# Altium PCB PCB1.PcbDoc
Units mil, origin at the board's own origin, x right, y up, seen from the top; angles counter-clockwise.
Board outline 2645.03 x 2125.03 mil, 2 copper layers (Top Layer, Bottom Layer); 38 components, 28 nets, 123 pads, 32 vias.
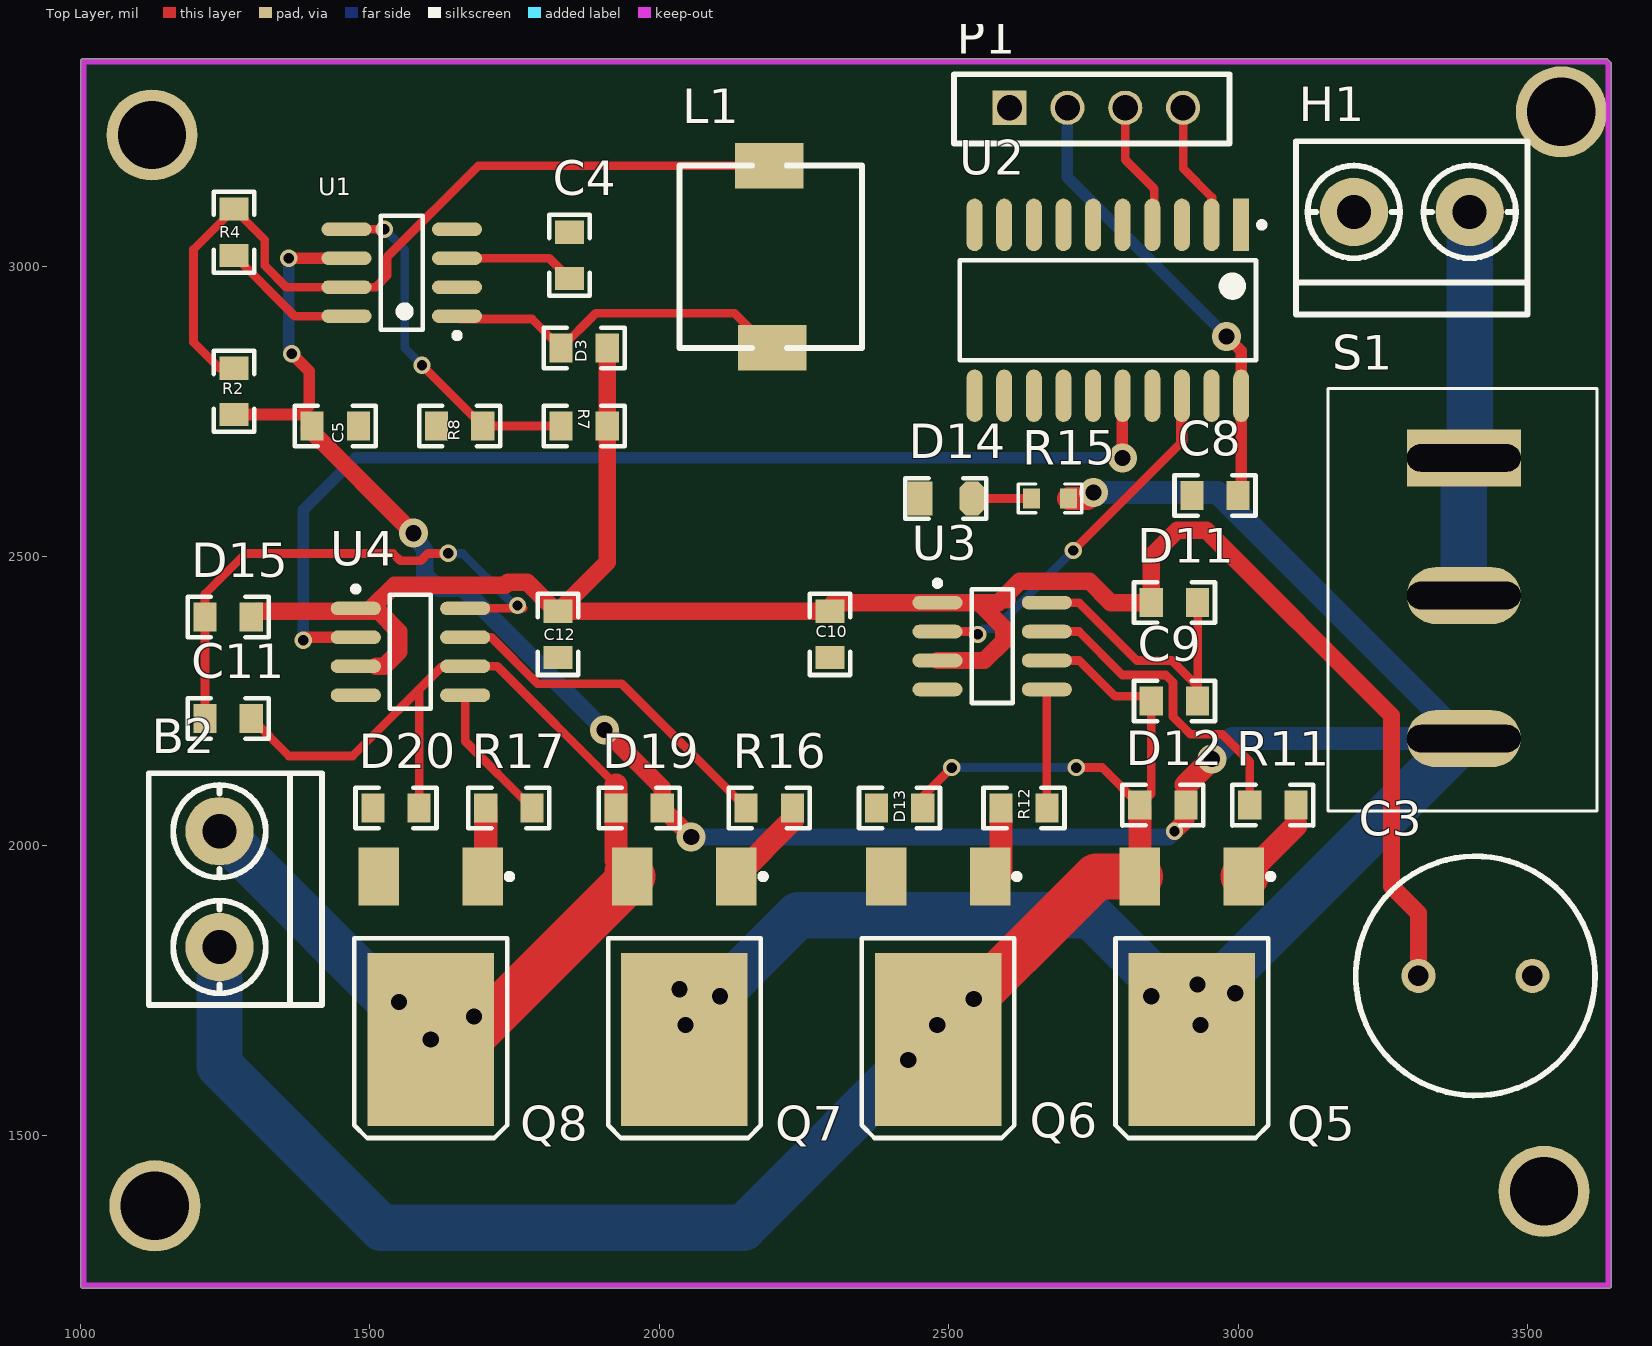
[diagram p0: Top Layer view]
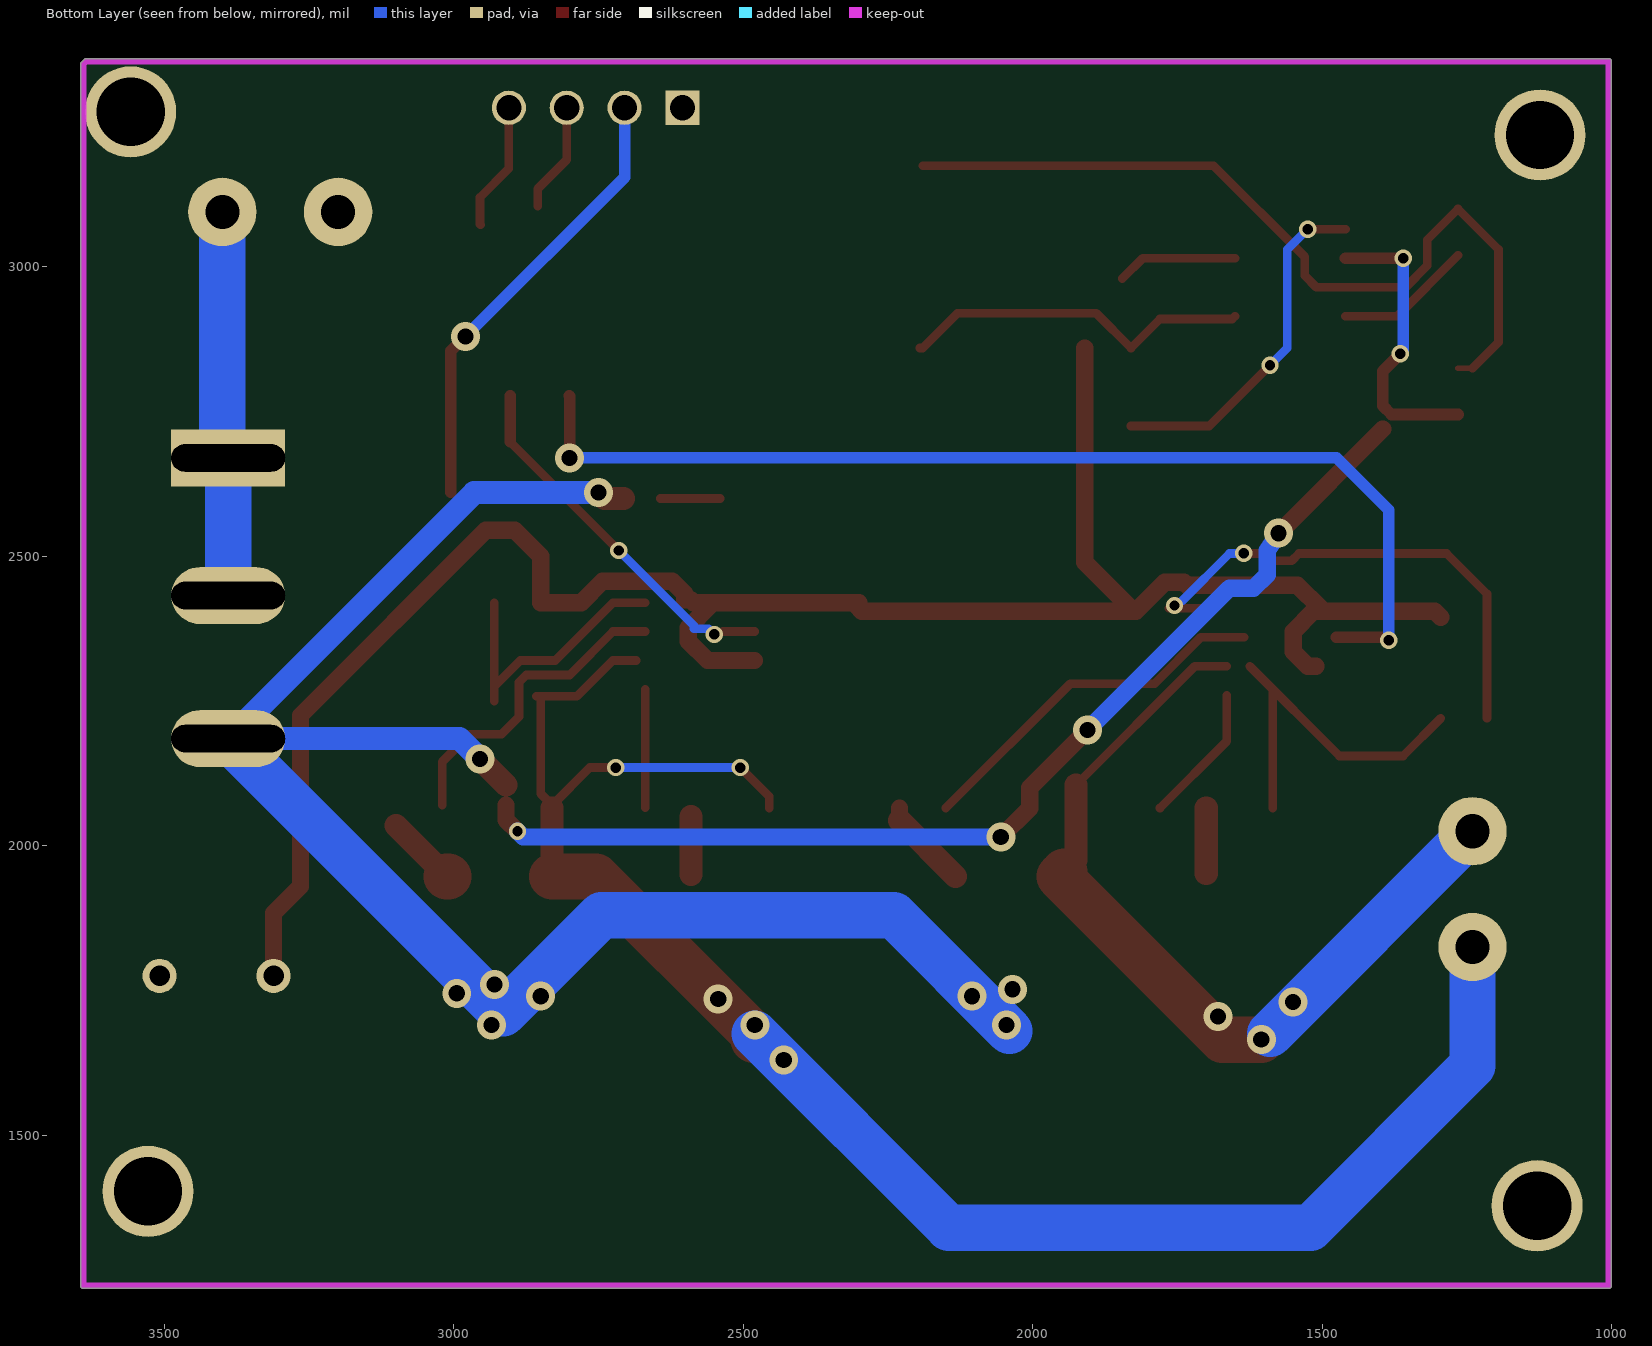
[diagram p1: Bottom Layer view, seen from below]

## Layer stack, top to bottom
Top Layer: signal copper 1.4
Dielectric: dielectric 12.6, FR-4, Dk 4.8
Bottom Layer: signal copper 1.4

## Board outline
1005,1234.98 cw(c1005,1240) 999.99,1240 999.99,3355 cw(c1005,3355) 1005,3360.01 3635,3360.01 cw(c3635,3355) 3638.56,3358.53 3638.55,3358.55 3643.55,3353.55 3643.53,3353.56 cw(c3640,3350) 3645.01,3350 3645.01,1240 cw(c3640,1240) 3640,1234.98

## Design rules (kind name [scope] priority, off if disabled: settings)
Clearance [All] p1: gap=10
PolygonConnect [All] p1: connectstyle=Relief reliefconductorwidth=10 reliefentries=4 polygonreliefangle="90 Angle" airgapwidth=10
RoutingVias [All] p1: holewidth=28 width=50 viastyle="Through Hole" minholewidth=28 minwidth=50 maxholewidth=28 maxwidth=50
SolderMaskExpansion [All] p1: expansion=4
Width [All] p1: maxlimit=100 minlimit=1 preferedwidth=10 minimp=50.000000 maximp=50.000000 favimp=50.000000
28 further rules are at their usual default settings.

## Components (designator, comment, footprint, x,y, rotation, side; value= is the part's Value field where it differs from the comment)
B2 "Motor" KF301-2P 1240,1925 r0 top
C3 "Cap Pol1" RB5-10.5 3410,1775 r0 top
C4 "Cap Pol1" 0805(2012) 1845,3020 r90 top
C5 "Cap Pol1" 0805(2012) 1440,2725 r0 top
C8 "Cap" 0805(2012) 2960,2605 r0 top
C9 "Cap" 0805(2012) 2890,2250 r0 top
C10 "Cap Pol1" 0805(2012) 2295,2365 r270 top
C11 "Cap" 0805(2012) 1255,2220 r180 top
C12 "Cap Pol1" 0805(2012) 1825,2365 r270 top
D3 "IN5819" 0805(2012) 1870,2860 r0 top
D11 "IN5819" 0805(2012) 2890,2420 r0 top
D12 "IN5819" 0805(2012) 2870,2070 r0 top
D13 "IN5819" 0805(2012) 2415,2065 r0 top
D14 "RED" 0805 2495,2600 r180 top
D15 "IN5819" 0805(2012) 1255,2395 r180 top
D19 "IN5819" 0805(2012) 1965,2065 r0 top
D20 "IN5819" 0805(2012) 1545,2065 r0 top
H1 "POWER IN" KF301-2P 3300,3095 r270 top
L1 "Inductor" 电感8*8 2260,2950 r270 top
P1 "PWM" PIN-4 2605,3280 r0 top
Q5 "IR7843" LR7843 2920,1805 r90 top
Q6 "IR7843" LR7843 2481.67,1805 r90 top
Q7 "IR7843" LR7843 2043.33,1805 r90 top
Q8 "IR7843" LR7843 1605,1805 r90 top
R2 "Res2" 0805(2012) 1265,2785 r90 top
R4 "Res2" 0805(2012) 1265,3060 r90 top
R7 "Res2" 0805(2012) 1870,2725 r180 top
R8 "Res2" 0805(2012) 1655,2725 r0 top
R11 "Res2" 0805(2012) 3060,2070 r0 top
R12 "Res2" 0805(2012) 2630,2065 r180 top
R15 "Res2" 0603 2675,2600 r180 top
R16 "Res2" 0805(2012) 2190,2065 r0 top
R17 "Res2" 0805(2012) 1740,2065 r180 top
S1 "sp" SWICH-3 3645,2245 r90 top
U1 "MC34063" MC34063 1555,2990 r180 top
U2 "74LS244" 74LS244 2775,2925 r270 top
U3 "IR2104S" IR2104S 2575,2345 r0 top
U4 "IR2104S" IR2104S 1570,2335 r0 top

## Footprints (in the part's own frame and the unit in brackets; to place one, negate y for a bottom-side part, rotate by r counter-clockwise, add the part's x,y. Pads: shape width x height; smd on the part's side, far side on the other; paste and mask are expansions set on the pad)
74LS244 [mm]
  rect 2.3x0.7 smd: 1(-3.75,5.85)
  oval 2.3x0.7 smd: 2(-3.75,4.55) 3(-3.75,3.25) 4(-3.75,1.95) 5(-3.75,0.65) 6(-3.75,-0.65) 7(-3.75,-1.95) 8(-3.75,-3.25) 9(-3.75,-4.55) 10(-3.75,-5.85) 11(3.75,-5.85) 12(3.75,-4.55) 13(3.75,-3.25) 14(3.75,-1.95) 15(3.75,-0.65) 16(3.75,0.65) 17(3.75,1.95) 18(3.75,3.25) 19(3.75,4.55) 20(3.75,5.85)
  silkscreen extent -3.87,-6.5 2.2,6.88
0603 [mil]
  rect 30x35 smd: 1(-32,0) 2(32,0)
  silkscreen extent -55,-25 55,25
0805 [mm]
  oct 1.1x1.5 smd: 1(-1.143,0)
  rect 1.1x1.5 smd: 2(1.143,0)
  silkscreen extent -1.78,-0.89 1.78,0.89
0805(2012) [mil]
  rect 40x50 smd: 1(-40,0) 2(40,0)
  silkscreen extent -70,-35 70,35
IR2104S [mm]
  oval 2.2x0.6 smd: 1(-2.4,1.905) 2(-2.4,0.635) 3(-2.4,-0.635) 4(-2.4,-1.905) 5(2.4,-1.905) 6(2.4,-0.635) 7(2.4,0.635) 8(2.4,1.905)
  silkscreen extent -2.52,-2.5 0.9,2.88, body extent -2,-2.5 2,2.5, height 1.75
KF301-2P [mm]
  round 3 hole 1.5: 1(0,-2.54) 2(0,2.54)
  silkscreen extent -3.1,-5.08 4.5,5.08
LR7843 [mm]
  rect 2.54x1.778 smd: 1(3.6,-2.28) 3(3.6,2.28)
  rect 7.6x5.55 smd: 2(-3.556,0)
  silkscreen extent -7.87,-3.58 3.72,3.35
MC34063 [mm] "SOIC, 8-Leads, Body 4.90x3.90mm, Pitch 1.27mm, IPC Medium Density"
  oval 2.2x0.6 smd: 1(-2.425,1.905) 2(-2.425,0.635) 3(-2.425,-0.635) 4(-2.425,-1.905) 5(2.425,-1.905) 6(2.425,-0.635) 7(2.425,0.635) 8(2.425,1.905)
  silkscreen extent -2.55,-2.5 0.93,2.88, body extent -2,-2.5 2,2.5, height 1.5
PIN-4 [mm]
  rect 1.5x1.5 hole 1.1: 1(0,-0.127)
  round 1.5 hole 1.1: 2(2.54,-0.127) 3(5.08,-0.127) 4(7.62,-0.127)
  silkscreen extent -2.44,-1.7 9.65,1.35
RB5-10.5 [mm] "Capacitor (Radial); 2 Leads"
  round 1.5 hole 0.9: 1(-2.5,0) 2(2.5,0)
  silkscreen extent -5.25,-5.25 5.25,5.25
SWICH-3 [mm]
  rect 2.5x5 hole 1.2 slot 5 at 90 deg: 1(10.795,6.477)
  oval 2.5x5 hole 1.2 slot 5 at 90 deg: 2(4.756,6.477) 3(-1.524,6.477)
  silkscreen extent -4.7,0.63 13.84,12.45
电感8*8 [mm]
  rect 2x3 smd: 1(-5.715,-1.778) 2(2.286,-1.651)
  silkscreen extent -5.72,-5.72 2.29,2.29

## Part data
B2: library part "Motor Servo", "Servo Motor"
C3 C4 C5 C10 C12: "Polarized Capacitor (Radial)"
C8 C9 C11: "Capacitor"
D3 D11 D12 D13 D15 D19 D20: library part Diode, "Default Diode"
D14: library part LED2, "Typical RED, GREEN, YELLOW, AMBER GaAs LED"
H1: library part "Header 2H", "Header, 2-Pin, Right Angle"
P1: library part "Header 4", "Header, 4-Pin"
Q5 Q6 Q7 Q8: "N-Channel Power MOSFET"
R2 R4 R7 R8 R11 R12 R15 R16 R17: "Resistor"

## Free pads (board coordinates)
  round 157.48 hole 118.11: 1(1123.43,3227.83) 2(3558.43,3267.83) 3(1128.43,1377.83) 4(3528.43,1402.83)

## Via types
v1: diameter 50, hole 28, Top Layer to Bottom Layer, 20 vias
v2: diameter 30, hole 18, Top Layer to Bottom Layer, 12 vias

## Nets (pads, with @x,y where several pads share a name; then routed paths per layer and width w, separated by ;. In a path a pad name is that pad's centre, name@x,y a point inside that pad or via, vN(x,y) a via of type N, cw(c..) or ccw(c..) an arc to the next point about the centre after c; other vN are vias at no path point)
5V: C8.2 P1.2 U2.20 | length 789.1
  Top Layer w20: v1(2980,2880) 3005.32,2854.68 U2.20 C8.2@3005.32,2610.32
  Bottom Layer w20: P1.2 2705,3155 v1(2980,2880)
12V: C3.1 C10.1 C12.1 D3.2 D11.1 D15.1 R7.1 U3.1 U3.3 U4.1 U4.3 | length 3602.4
  Top Layer w30: D15.1 1305,2405 1515,2405 1550,2370 1550,2335 1525,2310 U4.3@1510.55,2310 ; U4.1@1502.5,2410 1542.5,2450 1733.43,2450 1738.43,2455 1771.57,2455 1821.57,2405 C12.1 ; D3.2 R7.1 1910,2490 C12.1 ; C10.1@2300,2420 2585.93,2420 2590.93,2425 2601.18,2425 2601.18,2435.25 2622.74,2456.81 2743.19,2456.81 2780,2420 D11.1 2850,2500 2895,2545 2945,2545 3265,2225 3265,1930 3311.57,1883.43 C3.1 ; C10.1@2305,2415 C10.1 C12.1 ; U3.3 2561.57,2320 2595,2353.43 2595,2376.57 2556.57,2415
GND: C3.2 C4.2 C5.2 C8.1 C10.2 C12.2 D13.1 D14.2 D20.1 H1.1 P1.1 Q6.3 Q8.3 R8.1 U1.2 U1.4 U2.1 U2.3 U2.5 U2.6 U2.7 U2.8 U2.9 U2.10 U2.11 U2.12 U2.13 U2.14 U2.15 U2.17 U2.19 U3.4 U4.4
"MOTOR1 IN1": U2.18 U3.2 | length 632.7
  Top Layer w15: U3.2 2535,2370 ; v2@2550,2370 v2@2555,2370 ; v2(2715,2510) 2902.95,2697.95
  Top Layer w20: 2902.95,2697.95 U2.18
  Bottom Layer w15: v2(2550,2365) 2560,2375 2585,2375 2585,2380 v2(2715,2510)
"MOTOR1 IN2": U2.16 U4.2 | length 1880.4
  Top Layer w20: v2(1385,2355) 1385,2360 U4.2 ; v1(2800,2670) 2800,2776.77 U2.16
  Bottom Layer w20: v2(1385,2355) 1385,2580 1475,2670 v1(2800,2670)
NetB2_1: B2.1 C9.1 D12.1 D13.2 Q5.3 Q6.2 U3.6 | length 3117
  Top Layer w15: D13.2 2455,2085 v2(2505,2135) ; U3.6@2685,2320 2725.63,2320 2787.44,2258.19 C9.1@2857.32,2258.19 ; v2(2720,2135) 2765,2135 D12.1 2850,2090 C9.1
  Top Layer w40: Q5.3 D12.1@2830.24,2065
  Top Layer w80: Q6.2 2481.67,1673.33 2755.06,1946.73 Q5.3
  Bottom Layer w15: v2(2505,2135) v2(2720,2135)
  Bottom Layer w80: B2.1 1240,1620 1520,1340 2145,1340 v1@2480,1675
  other v1: 2430,1630 2480,1690 2543.33,1735
NetB2_2: B2.2 C11.1 D19.1 D20.2 Q7.3 Q8.2 U4.6 | length 2101.9
  Top Layer w15: C11.1 1360,2155 1470,2155 U4.6@1625,2310 ; D20.2 1585,2270 ; U4.6 1720,2310 1925,2105 ; Q7.3@1925,1975.3 Q7.3@1945.3,1955
  Top Layer w40: Q7.3@1925,1975.3 1925,2105
  Top Layer w80: v1(1605,1665) 1671.84,1665 Q7.3 Q7.3@1945.3,1955
  Bottom Layer w80: B2.2 v1@1590,1675
  other v1: 1680,1705 1550,1730
NetC4_1: C4.1 U1.3 | length 209
  Top Layer w15: U1.3 1810,3015 C4.1
NetC9_2: C9.2 D11.2 U3.8 | length 515.6
  Top Layer w15: U3.8 2725,2420 2825,2320 2885.1,2320 2930,2275.1 C9.2 D11.2
NetC11_2: C11.2 D15.2 U4.8 | length 920.2
  Top Layer w15: C11.2 D15.2 1215,2435 1285,2505 1539.9,2505 1552.4,2492.5 1587.6,2492.5 1600.1,2505 v2(1635,2505) ; U4.8@1685,2410 1765,2410 1755,2420 v2(1755,2415)
  Bottom Layer w15: v2(1635,2505) 1660,2505 v2@1742.5,2422.5 ; v2(1755,2415) v2@1755,2420
NetD3_1: D3.1 L1.2 U1.1 | length 617
  Top Layer w15: U1.1 1655.47,2910 1780,2910 D3.1 1890,2920 2130,2920 2190,2860 L1.2
NetD14_1: D14.1 R15.2 | length 103
  Top Layer w15: D14.1 R15.2
NetH1_2: H1.2 S1.1 S1.2 | length 666.9
  Bottom Layer w30: S1.1 S1.1@3400,2680
  Bottom Layer w80: S1.2 S1.1 ; S1.1@3400,2680 H1.2
NetL1_1: L1.1 R2.2 R4.2 U1.7 | length 1460.7
  Top Layer w10: R2.2@1240,2825 R2.2
  Top Layer w15: R2.2@1240,2825 1195,2870 1195,3030 R4.2 1318.5,3046.5 1318.5,3001.95 1355.45,2965 U1.7 1510,2965 1530,2985 1530,3017.48 1687.52,3175 L1.1
NetP1_3: P1.3 U2.4 | length 191.1
  Top Layer w15: P1.3 2805,3185 2855,3135 U2.4@2855,3104.57
NetP1_4: P1.4 U2.2 | length 223.4
  Top Layer w15: P1.4 2905,3170 2955,3120 2955,3073.5 U2.2
NetQ5_1: Q5.1 R11.2 | length 126.5
  Top Layer w40: Q5.1@3012.44,1947.44 3100,2035
  Top Layer w80: Q5.1 Q5.1@3012.44,1946.73
NetQ6_1: Q6.1 R12.2 | length 99.7
  Top Layer w40: Q6.1@2590,1950.3 R12.2@2590,2050
NetQ7_1: Q7.1 R16.2 | length 158.4
  Top Layer w30: R16.2@2230,2043.63 R16.2
  Top Layer w40: Q7.1 R16.2@2230,2043.63
NetQ8_1: Q8.1 R17.2 | length 113
  Top Layer w40: Q8.1@1700,1951.97 R17.2
NetR4_1: R4.1 U1.8 | length 238
  Top Layer w15: R4.1 1370,2915 U1.8
NetR7_2: R7.2 R8.2 U1.5 | length 610.9
  Top Layer w15: U1.5 v2(1525,3065) ; v2(1590,2830) R8.2 R7.2
  Bottom Layer w15: v2(1525,3065) 1560,3030 1560,2860 v2(1590,2830)
NetR11_1: R11.1 U3.7 | length 553.6
  Top Layer w15: U3.7 2725,2370 2800,2295 2874.75,2295 2887.5,2282.25 2887.5,2222.75 2917.75,2192.5 2972.6,2192.5 3020,2145.1 R11.1
NetR12_1: R12.1 U3.5 | length 204.5
  Top Layer w15: R12.1@2669.49,2065.51 U3.5
NetR16_1: R16.1 U4.7 | length 637.2
  Top Layer w15: U4.7@1635,2360 1709.64,2360 1789.64,2280 1935,2280 R16.1
NetR17_1: R17.1 U4.5 | length 242.8
  Top Layer w15: U4.5 1664.49,2180.51 R17.1
VBAT: C5.1 D12.2 D19.2 Q5.2 Q7.2 R2.1 R15.1 S1.3 U1.6 | length 5479.5
  Top Layer w20: R2.1 1380,2745 1395,2760 1395,2820 v2(1365,2850) v2@1365,2855 ; v2(1360,3015) U1.6
  Top Layer w30: C5.1@1395,2720 v1(1575,2540) ; v1(1905,2200) 2005,2100 D19.2 v1(2055,2015) ; v2(2890,2025) 2910,2045 D12.2
  Top Layer w40: R15.1 2740,2600 v1(2750,2610) ; 2910,2105 v1(2955,2150)
  Bottom Layer w20: v2(1360,3015) 1360,2855 v2(1365,2850)
  Bottom Layer w30: v1(1575,2540) 1595,2510 1595,2468.43 1618.43,2445 1660,2445 v1(1905,2200) ; v1(2055,2015) 2880,2015 v2(2890,2025)
  Bottom Layer w40: v1(2750,2610) 2965,2610 S1.3 2990,2185 v1(2955,2150)
  Bottom Layer w80: v1@2040,1680 2240,1880 2745,1880 2915,1710 S1.3
  other v1: 2045,1690 2935,1690 2105,1740 2850,1740 2995,1745 2035,1751.85 2930,1760
VCC: 

## Keep-outs
Keep-Out Layer:
  lines w10: 1005,1535 1005,3345 ; 1005,1575 1005,1240 3640,1240 3640,1540 ; 1005,3350 1005,3345 ; 3640,1530 3640,3350 3635,3355 1005,3355 1005,3345